# Altium PCB printer_tag_device.PcbDoc (part 2 of 3)
Units mm, origin at the board's own origin, x right, y up, seen from the top; angles counter-clockwise.
Board outline 140.18 x 100.02 mm, 2 copper layers (Top Layer, Bottom Layer); 258 components, 169 nets, 954 pads, 344 vias.
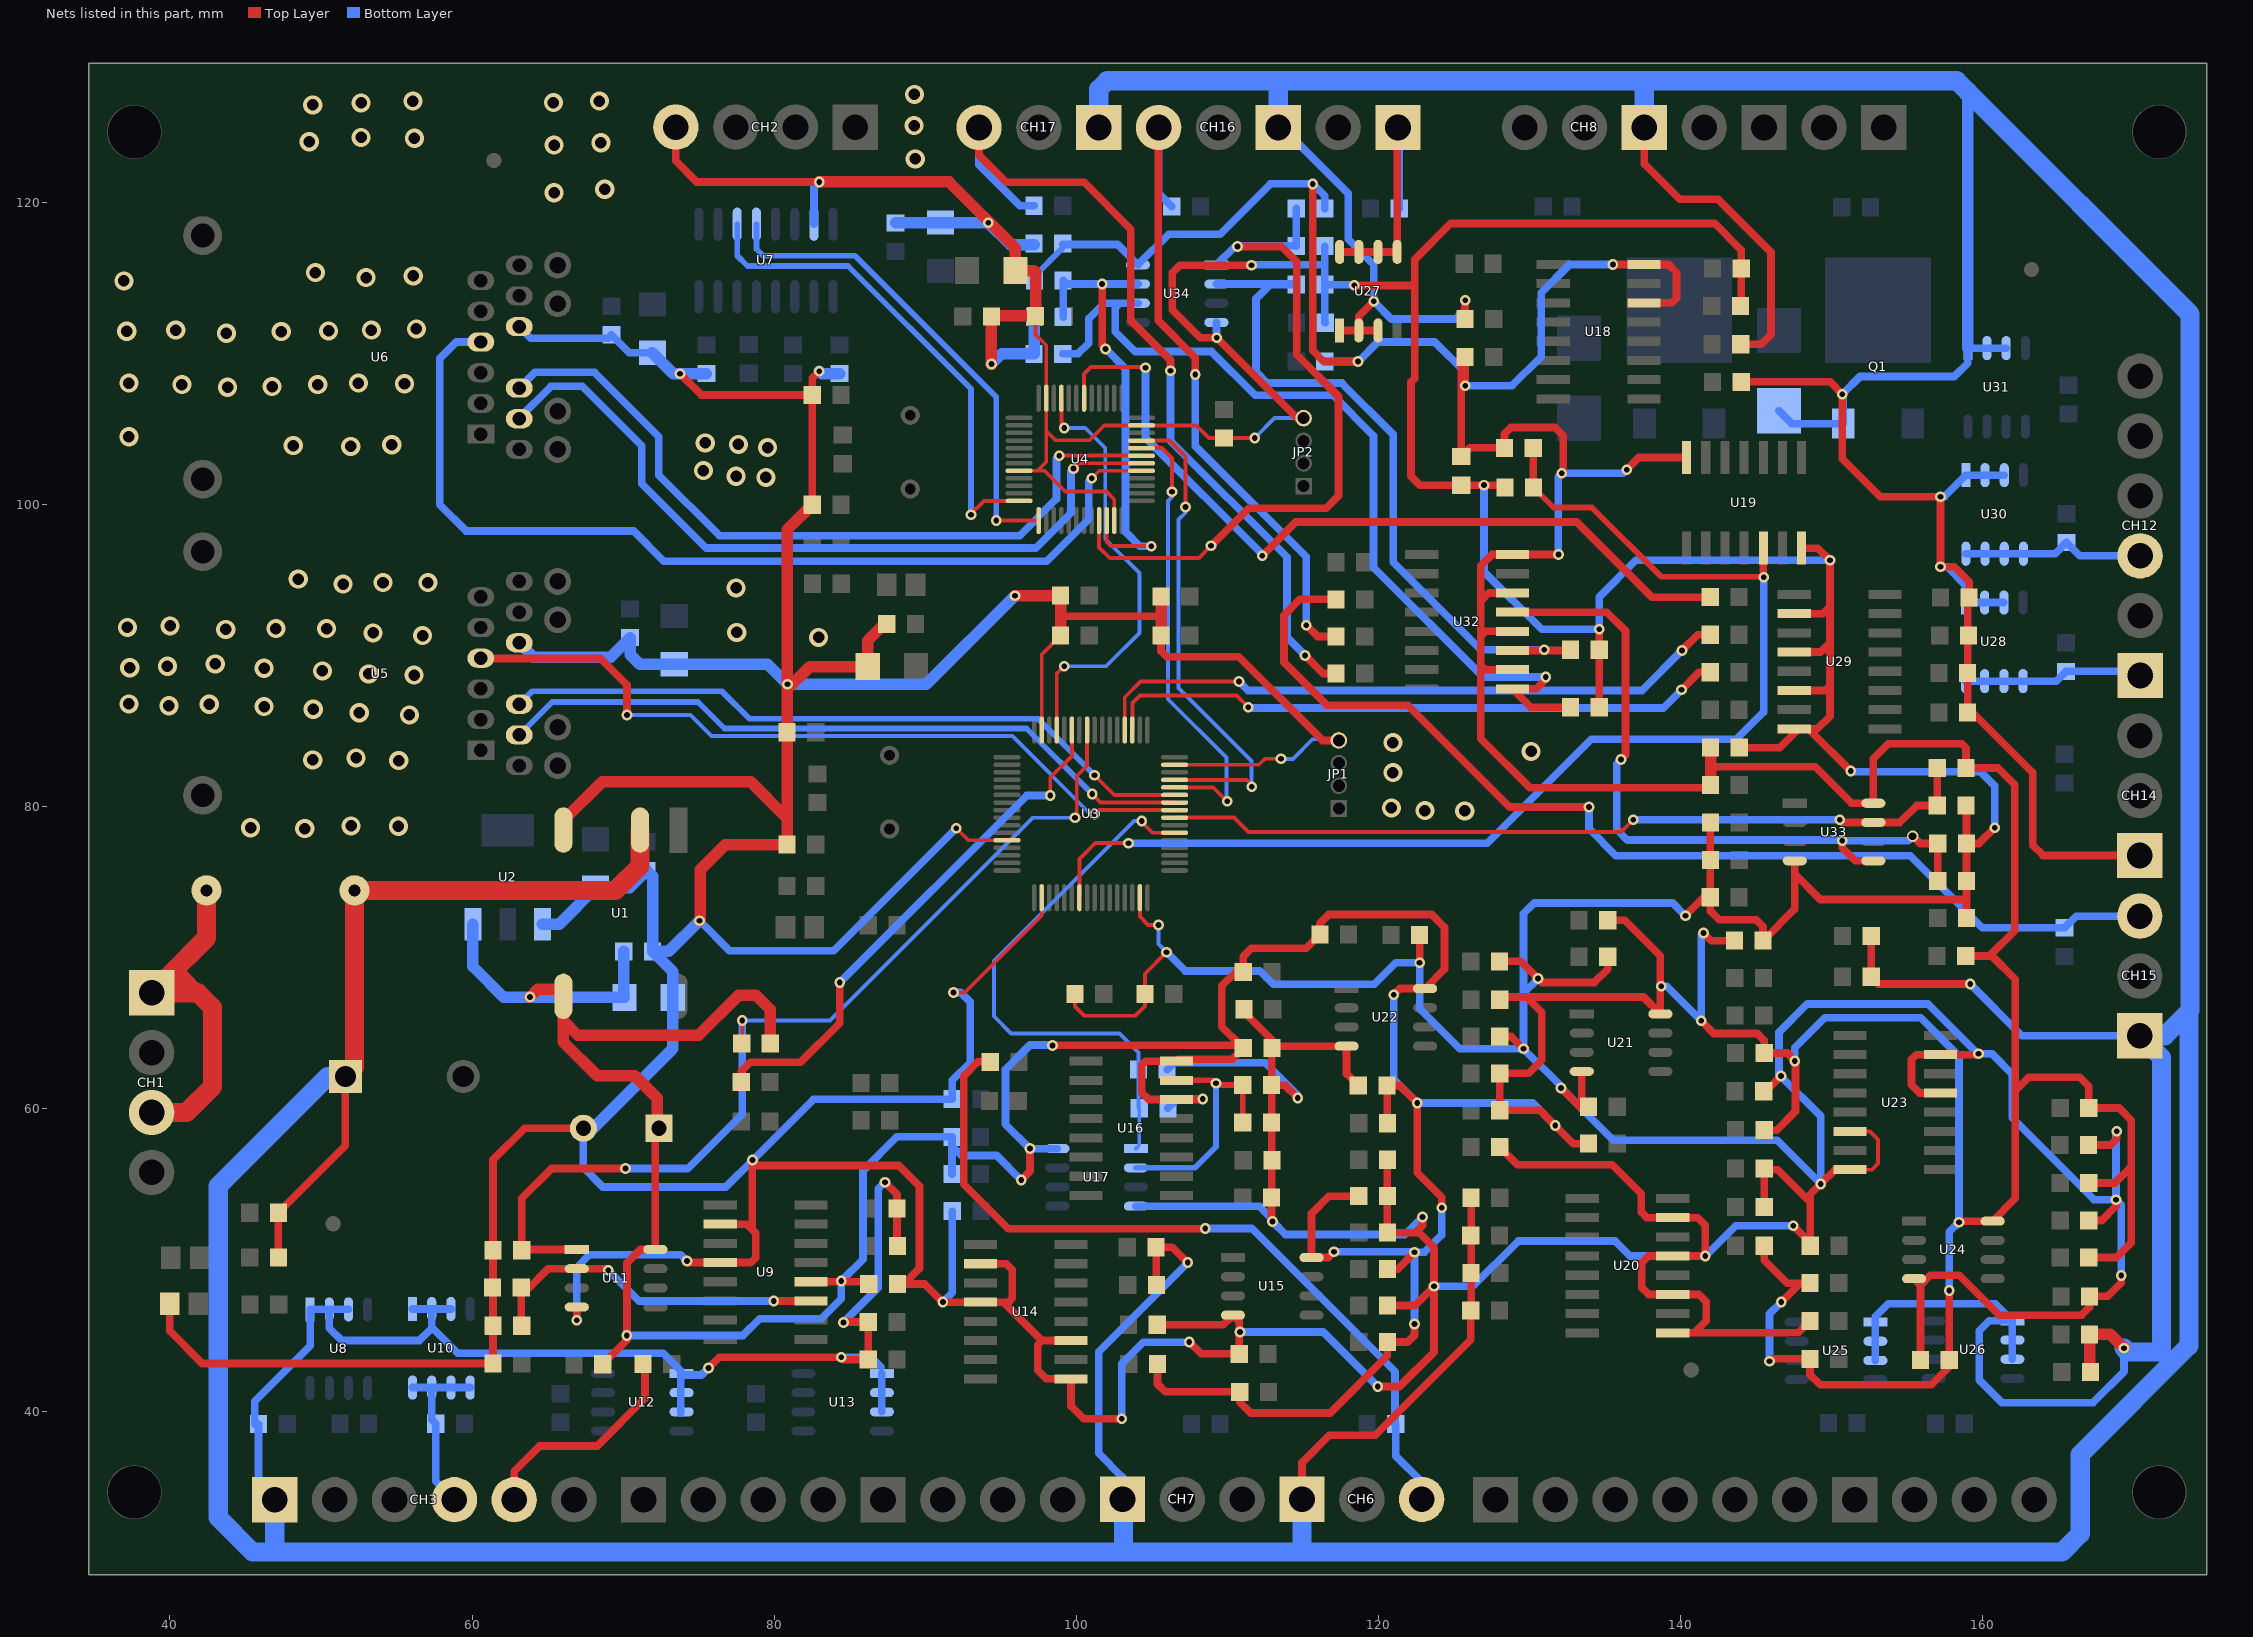
[diagram p2: the nets of this part, all layers, seen from the top]

## Via types
v1: diameter 0.711, hole 0.381, Top Layer to Bottom Layer, 231 vias
v2: diameter 1.27, hole 0.762, Top Layer to Bottom Layer, 107 vias
v3: diameter 3.4, hole 3.4, Top Layer to Bottom Layer, 4 vias
v4: diameter 0.711, hole 0.305, Top Layer to Bottom Layer, 1 vias
v5: diameter 0.762, hole 0.508, Top Layer to Bottom Layer, 1 vias

## Nets (pads, with @x,y where several pads share a name; then routed paths per layer and width w, separated by ;. In a path a pad name is that pad's centre, name@x,y a point inside that pad or via, vN(x,y) a via of type N, cw(c..) or ccw(c..) an arc to the next point about the centre after c; other vN are vias at no path point) (continued)
+5V: C2.2 C3.1 C5.1 C35.2 C40.2 C45.2 C51.2 C57.2 C58.2 C65.2 C76.2 C83.2 R18.1 R20.1 R27.1 R28.1 R30.1 R31.1 R33.1 R35.1 R37.1 R38.1 R46.1 R48.1 R52.1 R54.1 R55.1 R56.1 R59.1 R60.1 R61.1 R62.1 R64.1 R66.1 R68.1 R69.1 R71.1 R72.1 R74.1 R88.2 R90.2 R91.2 R96.2 R98.2 R99.2 U1.5 U2.3 U9.12 U11.8 U15.8 U16.14 U16.16 U17.8 U18.14 U18.16 U19.14 U21.8 U22.8 U24.8 U32.10 U32.12 U32.14 U32.16 U33.8 U34.8 | length 616.5
  Top Layer w0.508: R20.1@68.641,43.104 70.256,44.719 70.256,49.809 71.145,50.698 U11.8@72.129,50.698 72.129,59.531 72.263,59.665 ; U9.12@82.426,48.565 86.096,48.565 C35.2@86.248,48.412 ; v1(96.342,55.296) 96.926,55.88 v1(96.926,57.379) ; v1(98.425,64.211) C40.2@110.861,64.211 ; R33.1@105.369,43.129 105.369,41.798 105.893,41.275 R27.1@110.81,41.275 110.81,40.599 111.531,39.878 116.789,39.878 120.584,43.673 R30.1@120.584,44.577 121.92,44.577 122.377,45.034 v1(122.377,45.771) ; v1(108.356,60.655) 108.331,60.63 U16.14@106.632,60.63 104.775,60.63 104.318,61.087 104.318,62.916 104.572,63.17 U16.16@106.632,63.17 106.764,63.302 110.307,63.302 C40.2@111.039,64.033 C40.2@110.861,64.211 ; v1(115.646,121.234) 115.646,110.211 116.383,109.474 v1(118.643,109.474) ; v1(117.043,50.546) 116.662,50.165 U15.8@115.563,50.165 115.563,53.079 116.713,54.229 C45.2@118.684,54.229 ; R31.1@120.584,49.403 121.26,49.403 v1(122.377,50.521) ; R28.1@120.584,59.055 120.584,61.519 C58.2@120.559,61.544 121.412,61.544 v1(122.555,60.401) 122.555,55.778 124.181,54.153 v1(124.181,53.467) ; v1(121.006,67.564) 121.412,67.97 U22.8@123.081,67.97 124.358,69.247 124.358,72.034 123.52,72.873 116.713,72.873 116.119,72.278 R56.1@116.119,71.552 115.204,70.637 111.582,70.637 111.039,70.094 R54.1@111.039,69.063 110.541,69.063 109.626,68.148 109.626,65.446 C40.2@110.861,64.211 ; R48.1@125.72,109.779 R48.1@125.72,109.601 ; v1(125.73,107.874) 125.72,107.884 R48.1@125.72,109.601 ; R62.1@128.204,67.412 137.534,67.412 U21.8@138.652,66.294 138.652,70.136 136.296,72.492 R55.1@135.164,72.492 ; U32.10@128.857,89.078 127.076,89.078 126.771,89.383 ; U32.12@128.857,91.618 127.102,91.618 126.771,91.288 ; U32.14@128.857,94.158 127.305,94.158 126.771,93.624 ; 129.972,67.234 130.81,66.396 130.81,63.221 129.946,62.357 R61.1@128.026,62.357 R66.1@128.026,59.919 130.683,59.919 132.893,57.709 R52.1@133.899,57.709 ; v1(131.902,96.698) U32.16@128.857,96.698 127.508,96.698 126.771,95.961 126.771,93.624 ; v1(132.131,102.083) 132.232,102.184 132.232,104.572 131.699,105.105 128.753,105.105 128.336,104.689 R46.1@128.336,103.759 126.05,103.759 C51.2@125.476,103.185 125.476,109.357 R48.1@125.72,109.601 ; v1(135.509,115.9) U18.16@137.569,115.9 139.192,115.9 139.725,115.367 139.725,113.665 139.421,113.36 U18.14@137.569,113.36 ; v1(136.423,102.311) 137.239,103.127 U19.14@140.386,103.127 ; v1(141.351,65.837) 142.189,64.999 145.059,64.999 145.527,64.531 R60.1@145.527,63.703 147.066,63.703 147.599,63.17 147.599,59.842 146.36,58.603 R59.1@145.527,58.603 ; v1(141.503,71.653) 142.011,71.145 C57.2@143.551,71.145 ; R88.2@141.976,81.439 141.792,81.255 130.023,81.255 126.771,84.506 126.771,89.383 ; 141.976,82.677 142.001,82.652 148.895,82.652 151.308,80.239 U33.8@152.749,80.239 152.749,83.178 153.746,84.176 158.598,84.176 158.887,83.886 R90.2@158.887,82.575 160.985,82.575 162.103,81.458 162.103,71.806 160.426,70.129 ; R64.1@145.527,50.952 145.527,50.002 147.058,48.472 147.913,48.472 ; v1(145.872,43.307) 146.025,43.459 R68.1@148.554,43.459 148.554,42.428 149.225,41.758 156.591,41.758 157.77,42.936 C65.2@157.77,43.383 v1(157.77,47.981) ; v1(146.66,47.219) 147.913,48.472 ; R69.1@148.554,48.472 147.913,48.472 ; v1(158.42,52.502) 158.496,52.578 U24.8@160.648,52.578 162.154,54.084 162.154,61.214 ; R91.2@158.862,70.129 160.426,70.129 ; R74.1@167.015,50.165 168.834,50.165 169.824,51.156 169.824,59.258 169.012,60.071 R72.1@167.015,60.071 167.015,61.509 166.421,62.103 163.043,62.103 162.154,61.214 ; R71.1@167.015,55.103 168.742,55.103 169.697,56.058 ; 126.771,89.383 126.771,91.288 ; 126.771,91.288 126.771,93.624 ; 160.426,70.129 160.604,70.129 162.154,68.58 162.154,61.214
  Top Layer w0.762: v1(63.83,67.412) 64.336,67.918 65.583,67.918 U1.5@66.04,67.461 66.04,65.837 ; 72.263,59.665 72.263,60.706 70.764,62.205 68.275,62.205 66.04,64.44 66.04,65.837 ; R18.1@79.741,64.338 79.741,66.589 78.791,67.539 77.648,67.539 75.006,64.897 66.98,64.897 66.04,65.837 ; R88.2@141.976,81.439 141.976,82.677 C76.2@141.976,83.922
  Bottom Layer w0.381: R98.2@97.221,114.833 97.221,115.128 99.096,117.003 99.096,117.221 C83.2@99.096,117.297
  Bottom Layer w0.508: v1(70.231,45.009) 77.927,45.009 79.045,46.126 83.109,46.126 84.43,47.447 v1(84.43,48.616) 85.877,50.063 85.877,55.931 88.104,58.158 R37.1@91.76,58.158 R37.1@91.76,57.567 ; R38.1@91.76,55.685 R37.1@91.76,57.567 ; v1(96.342,55.296) 94.717,56.921 92.405,56.921 R37.1@91.76,57.567 ; v1@98.45,64.237 96.926,64.237 95.301,62.611 95.301,59.004 v1(96.926,57.379) U17.8@98.737,57.379 ; C83.2@99.096,117.221 102.725,117.221 U34.8@104.071,115.875 106.103,117.907 109.525,117.907 112.852,121.234 v1(115.646,121.234) 116.444,120.437 R96.2@116.444,119.609 ; R35.1@106.055,60.046 106.665,60.655 v1(108.356,60.655) ; R99.2@116.444,109.474 v1(118.643,109.474) 119.939,110.769 123.723,110.769 125.73,108.763 v1(125.73,107.874) 128.829,107.874 130.759,109.804 130.759,114.021 132.639,115.9 v1(135.509,115.9) ; v1(117.043,50.546) 122.377,50.546 v1(122.377,50.521) ; v1(121.006,67.564) 121.006,61.951 v1(122.555,60.401) 130.2,60.401 v1(131.699,58.903) ; v1(122.377,45.771) v1(122.377,50.521) ; v1(124.181,53.467) 124.181,51.664 123.038,50.521 v1(122.377,50.521) ; v1(131.902,96.698) 131.902,101.854 v1(132.131,102.083) 136.195,102.083 v1(136.423,102.311) ; v1(138.709,68.123) 139.065,68.123 v1(141.351,65.837) 141.351,71.501 v1(141.503,71.653) ; v1(145.872,43.307) 145.872,46.431 v1(146.66,47.219) ; v1(147.549,63.17) 147.549,64.059 149.53,66.04 155.88,66.04 158.42,63.5 v1(158.42,52.502) 157.785,51.867 157.785,47.996 v1(157.77,47.981)
  Bottom Layer w0.762: U2.3@60.057,72.236 60.057,69.432 62.103,67.386 C5.1@70.079,67.386 70.043,67.422 C2.2@70.043,70.434
+24V: C1.1 C4.2 C30.1 CH3.1 CH6.1 CH7.1 CH8.1 CH14.1 CH15.1 CH16.1 CH17.1 D3.2 F1.2 Q1.3 R1.2 R13.2 R15.1 R22.2 R23.2 R26.1 R32.1 R44.1 R49.1 R50.1 R51.1 R53.1 R63.1 R65.1 R67.1 R73.1 R75.1 R76.1 R79.1 R80.1 R83.1 R84.1 U1.2 U8.1 U8.2 U8.3 U10.1 U10.2 U10.3 U12.1 U12.2 U12.3 U13.1 U13.2 U13.3 U25.1 U25.2 U25.3 U26.1 U26.2 U26.3 U27.1 U27.2 U27.3 U28.1 U28.2 U28.3 U30.1 U30.2 U30.3 U31.1 U31.2 U31.3 | length 763.5
  Top Layer w0.508: R1.2@47.178,50.165 C4.2@47.178,53.137 51.613,57.572 C1.1@51.613,62.154 ; v1(75.641,42.85) 76.352,43.561 v1(84.43,43.561) 84.582,43.409 R32.1@86.223,43.409 R26.1@86.223,45.898 84.607,45.898 v1(84.582,45.872) ; v1(87.325,55.143) 88.123,54.346 R13.2@88.123,53.416 88.123,50.952 R15.1@88.148,50.927 ; R23.2@105.293,48.362 105.293,50.825 R22.2@105.268,50.851 106.35,50.851 v1(107.366,49.835) ; CH6.1@114.935,34.163 114.935,36.601 116.738,38.405 119.786,38.405 126.101,44.719 R65.1@126.101,46.66 126.126,46.685 R63.1@126.126,49.149 R51.1@126.126,54.127 ; U27.1@117.424,111.531 U27.2@118.694,111.531 ; v1(119.685,113.462) 118.694,112.471 U27.2@118.694,111.531 ; U27.3@119.964,111.531 U27.2@118.694,111.531 ; R44.1@125.72,112.293 125.72,113.528 v1(125.73,113.538) ; CH8.1@137.592,124.968 137.592,122.555 139.929,120.218 142.469,120.218 145.974,116.713 145.974,111.252 145.339,110.617 R49.1@143.977,110.617 ; R50.1@144.003,108.128 149.885,108.128 v1(150.698,107.315) 150.698,103.048 153.213,100.533 v1(157.201,100.533) v1(157.201,95.885) 158.115,95.885 159.09,94.91 R79.1@159.09,93.853 158.989,93.751 R83.1@158.989,88.849 R84.1@158.989,86.233 159.334,86.233 163.297,82.271 163.297,77.47 163.982,76.784 CH14.1@170.383,76.784 ; R73.1@152.613,71.45 R67.1@152.613,68.758 153.096,68.275 v1(159.156,68.275)
  Top Layer w0.762: R75.1@167.117,42.596 167.066,42.647 R76.1@167.066,45.085 168.427,45.085 v1(169.342,44.171)
  Top Layer w1.27: C1.1@51.613,62.154 52.222,62.763 F1.2@52.222,74.473 69.494,74.473 71.12,76.098 U1.2@71.12,78.461
  Bottom Layer w0.508: C30.1@45.608,39.141 45.608,40.655 49.276,44.323 U8.1@49.276,46.736 U8.2@50.546,46.736 ; C30.1@45.862,39.141 45.862,35.215 CH3.1@46.939,34.138 ; U8.3@51.816,46.736 U8.2@50.546,46.736 ; U10.1@56.058,46.761 U10.2@57.328,46.761 ; U10.3@58.598,46.761 U10.2@57.328,46.761 ; U12.3@73.812,39.853 U12.1@73.812,42.393 ; v1(75.641,42.85) 75.184,42.393 U12.1@73.812,42.393 ; v1(84.43,43.561) 86.411,43.561 87.071,42.901 ; v1(84.582,45.872) 86.893,48.184 86.893,54.712 v1(87.325,55.143) ; U13.3@87.122,39.954 U13.2@87.122,41.224 U13.1@87.122,42.494 ; CH7.1@103.048,34.163 103.048,35.636 101.473,37.211 101.473,43.942 v1(107.366,49.835) ; CH16.1@113.36,124.968 113.614,124.968 117.983,120.599 117.983,117.577 119.685,115.875 v1(119.685,113.462) 120.853,112.293 125.12,112.293 125.73,112.903 v1(125.73,113.538) ; D3.2@146.507,106.229 147.368,105.368 Q1.3@150.76,105.368 150.76,107.253 v1(150.698,107.315) 151.867,108.483 158.115,108.483 159.004,109.372 U31.1@159.004,110.363 U31.2@160.274,110.363 U31.3@161.544,110.363 ; U25.3@152.883,43.358 U25.2@152.883,44.628 U25.1@152.883,45.898 152.883,46.253 153.746,47.117 160.807,47.117 U26.1@161.95,45.974 ; v1(157.201,95.885) 157.632,95.885 158.852,94.666 U28.1@158.852,93.523 U28.2@160.122,93.523 U28.3@161.392,93.523 ; v1(157.201,100.533) 157.455,100.533 U30.1@158.877,101.956 U30.2@160.147,101.956 U30.3@161.417,101.956 ; v1(159.156,68.275) 162.585,64.846 CH15.1@170.383,64.846 ; U26.3@161.95,43.434 U26.2@161.95,44.704 U26.1@161.95,45.974 ; v1(169.342,44.171) 169.342,42.621 167.284,40.564 161.265,40.564 159.766,42.062 159.766,45.314 160.426,45.974 U26.1@161.95,45.974 ; U8.2@50.546,46.736 50.546,45.491 51.359,44.679 56.515,44.679 57.328,45.491 57.328,45.568 ; 57.328,45.568 59.055,43.84 72.644,43.84 73.812,42.672 U12.1@73.812,42.393 ; 57.328,45.568 U10.2@57.328,46.761
  Bottom Layer w0.762: U31.1@159.004,110.363 159.004,127.33
  Bottom Layer w1.27: CH3.1@46.939,34.138 46.939,30.668 ; C1.1@51.613,62.154 50.444,62.154 43.193,54.902 43.193,32.956 45.481,30.668 46.939,30.668 ; CH17.1@101.473,124.968 101.473,127.508 102.032,128.067 113.792,128.067 ; CH7.1@103.048,34.163 103.124,34.087 103.124,30.668 ; CH16.1@113.36,124.968 113.36,127.635 113.792,128.067 ; CH6.1@114.935,34.163 114.935,30.668 ; CH8.1@137.592,124.968 137.592,127.914 137.744,128.067 ; v1(169.342,44.171) 169.596,43.917 171.831,43.917 171.831,63.398 CH15.1@170.383,64.846 172.034,64.846 173.634,66.446 ; 46.939,30.668 103.124,30.668 ; 103.124,30.668 114.935,30.668 ; 113.792,128.067 137.744,128.067 ; 114.935,30.668 165.237,30.668 166.446,31.877 166.446,37.135 173.634,44.323 173.634,66.446 ; 137.744,128.067 158.267,128.067 159.004,127.33 173.711,112.624 173.711,66.523 173.634,66.446
+24V_IN: CH1.1 CH1.3 F1.1 | length 23.6
  Top Layer w1.016: CH1.1@39.853,68.758 40.767,68.758 41.834,67.691
  Top Layer w1.27: CH1.3@38.786,59.771 41.102,59.771 42.824,61.493 42.824,66.7 41.834,67.691 CH1.1@38.786,67.691 ; CH1.1@39.853,68.758 42.418,71.323 F1.1@42.418,74.473
AIR_BLOW_IN: R85.1 U3.51 | length 41.6
  Top Layer w0.254: U3.51@103.702,85.087 103.702,86.862 104.216,87.376 110.592,87.376 v1(111.379,86.589)
  Top Layer w0.508: v1(140.056,87.757) 141.211,88.913 R85.1@141.95,88.913
  Bottom Layer w0.508: v1(111.379,86.589) 111.43,86.538 138.836,86.538 v1(140.056,87.757)
AIR_BLOW_OUT: C72.2 CH12.3 U30.5 U30.6 U30.7 U30.8 | length 12.2
  Bottom Layer w0.508: U30.8@158.877,96.756 U30.7@160.147,96.756 U30.6@161.417,96.756 U30.5@162.687,96.756 164.787,96.756 C72.2@165.532,97.5 166.415,96.617 CH12.3@170.409,96.617
AIR_CYLINDER_IN: R82.1 U3.52 | length 43.1
  Top Layer w0.254: U3.52@103.202,85.087 103.202,87.251 104.242,88.29 v1(110.769,88.29)
  Top Layer w0.508: v1(140.081,90.348) 141.129,91.396 R82.1@141.95,91.396
  Bottom Layer w0.508: v1(110.769,88.29) 111.354,87.706 137.439,87.706 v1(140.081,90.348)
AIR_CYLINDER_OUT: C71.2 CH12.1 U28.5 U28.6 U28.7 U28.8 | length 11.9
  Bottom Layer w0.508: U28.8@158.852,88.323 U28.7@160.122,88.323 U28.6@161.392,88.323 U28.5@162.662,88.323 164.863,88.323 C71.2@165.506,88.966 170.139,88.966 CH12.1@170.409,88.697
BAFFLE_IN: R81.1 U4.42 | length 54.2
  Top Layer w0.254: U4.42@100.504,107.047 100.504,108.657 100.965,109.118 104.521,109.118 v1(104.572,109.068)
  Top Layer w0.508: v1(112.293,96.622) 114.529,98.857 133.121,98.857 138.1,93.878 R81.1@141.95,93.878
  Bottom Layer w0.508: v1(104.572,109.068) 104.572,104.445 112.293,96.723 v1(112.293,96.622)
BAFFLE_INTER: C86.2 R102.2 U32.9 U34.6 | length 59.4
  Top Layer w0.508: v1(131.064,88.595) 131.064,88.443 130.429,87.808 U32.9@128.857,87.808 130.076,86.589 R102.2@132.705,86.589
  Bottom Layer w0.508: C86.2@99.096,109.982 100.101,109.982 100.813,110.693 100.813,112.319 101.829,113.335 102.87,113.335 ; U34.6@104.071,113.335 102.87,113.335 ; v1(131.064,88.595) 126.924,88.595 119.659,95.86 119.659,104.572 116.992,107.239 111.836,107.239 108.941,110.134 103.886,110.134 102.565,111.455 102.565,113.03 102.87,113.335
BAFFLE_INTER_IN: C87.2 CH17.3 R100.1 | length 56.8
  Top Layer w0.508: CH17.3@93.553,124.968 93.553,123.134 95.352,121.336 100.508,121.336 103.607,118.237 103.607,112.192 106.223,109.576 v1(106.223,108.864) ; v1(115.138,90.018) 116.332,88.824 R100.1@117.185,88.824
  Bottom Layer w0.508: CH17.3@93.553,124.968 93.553,122.499 96.266,119.786 C87.2@97.196,119.786 ; v1@106.172,108.89 v1@106.223,108.839 ; v1(106.223,108.864) v1@106.223,108.839 ; v1(115.138,90.018) 113.944,91.211 113.944,96.52 106.223,104.242 v1@106.223,108.839
BAFFLE_INTER_OUT: C82.1 R98.1 U4.22 U34.7 | length 31.1
  Top Layer w0.254: U4.22@102.004,98.947 102.004,97.539 102.286,97.257 v1(104.953,97.257)
  Top Layer w0.508: v1(101.702,114.605) 101.702,110.541 v1(101.93,110.312)
  Bottom Layer w0.508: C82.1@99.121,112.42 R98.1@99.121,114.833 ; R98.1@99.121,114.859 99.375,114.605 v1(101.702,114.605) U34.7@104.071,114.605 ; v1(101.93,110.312) 103.251,108.991 103.251,98.196 104.191,97.257 v1(104.953,97.257)
BAFFLE_OUT: C70.2 CH13.1 U27.5 U27.6 U27.7 U27.8 | length 17.5
  Top Layer w0.508: U27.8@117.424,116.731 U27.7@118.694,116.731 U27.6@119.964,116.731 U27.5@121.234,116.731 121.234,124.917 CH13.1@121.285,124.968
  Bottom Layer w0.508: CH13.1@121.285,124.968 121.371,124.882 C70.2@121.371,119.609
BAFFLE_OUTER: C84.1 R97.2 U32.11 U34.2 | length 48.7
  Top Layer w0.508: U32.11@128.857,90.348 132.654,90.348 R97.2@132.705,90.399
  Bottom Layer w0.508: U34.2@109.271,114.605 114.506,114.605 C84.1@114.544,114.567 112.814,114.567 111.887,113.64 111.887,108.788 112.624,108.052 117.577,108.052 120.98,104.648 120.98,96.19 126.771,90.399 v1(130.962,90.399)
BAFFLE_OUTER_IN: C85.2 CH16.3 R95.1 | length 44.9
  Top Layer w0.508: CH16.3@105.44,124.968 105.41,124.938 105.41,112.192 107.874,109.728 v1(107.874,108.61) ; v1(115.214,92.024) 115.959,91.279 R95.1@117.185,91.279
  Bottom Layer w0.508: CH16.3@105.44,124.968 105.44,120.61 C85.2@106.314,119.736 ; v1@107.874,108.636 v1(107.874,108.61) 107.874,103.886 115.214,96.545 v1(115.214,92.024)
BAFFLE_OUTER_OUT: C81.1 R96.1 U4.21 U34.1 | length 48.9
  Top Layer w0.254: U4.21@101.504,98.947 101.504,97.175 102.21,96.469 108.102,96.469 v1(108.915,97.282)
  Top Layer w0.508: v1(108.915,97.282) 111.404,99.771 116.535,99.771 117.348,100.584 117.348,107.163 114.579,109.931 114.579,116.078 113.563,117.094 v1(110.668,117.094)
  Bottom Layer w0.508: U34.1@109.271,115.875 110.541,117.145 114.512,117.145 C81.1@114.544,117.113 R96.1@114.544,119.609
CPU1_FOR_CPU2_1: U3.44 U4.32 | length 30.6
  Top Layer w0.254: U4.32@104.304,103.747 105.676,103.747 106.324,103.099 v1(106.324,100.863) ; U3.44@106.502,81.287 109.061,81.287 v1(109.982,80.366)
  Bottom Layer w0.254: v1(106.324,100.863) 106.324,100.508 106.07,100.254 106.07,87.122 109.931,83.261 109.931,80.416 v1(109.982,80.366)
CPU1_FOR_CPU2_2: U3.45 U4.33 | length 32.7
  Top Layer w0.254: U4.33@104.304,104.247 106.167,104.247 107.213,103.2 v1(107.213,99.847) ; U3.45@106.502,81.787 111.279,81.787 v1@111.608,81.458
  Bottom Layer w0.254: v1(107.213,99.847) 107.213,99.466 106.756,99.009 106.756,87.859 111.582,83.033 111.582,81.356 v1(111.608,81.331)
CPU1_FOR_CPU2_3: U3.61 U4.45 | length 28.8
  Top Layer w0.254: U3.61@98.702,85.087 98.702,88.822 v1(99.187,89.306) ; U4.45@99.004,107.047 99.004,105.263 v1(99.187,105.08)
  Bottom Layer w0.254: v1(99.187,89.306) 101.956,89.306 104.165,91.516 104.165,95.479 101.905,97.739 101.905,103.759 100.584,105.08 v1(99.187,105.08)
CPU1_NET_RST: U3.41 U5.4 | length 51.5
  Top Layer w0.254: v1(101.194,79.527) 101.453,79.787 U3.41@106.502,79.787
  Top Layer w0.508: U5.4@60.579,89.84 60.604,89.814 68.504,89.814 70.256,88.062 v1(70.256,86.081)
  Bottom Layer w0.254: v1(70.256,86.081) 74.447,86.081 75.844,84.684 95.758,84.684 100.914,79.527 v1(101.194,79.527)
CPU1_USART1_RXD: U3.43 U5.9 | length 46.6
  Top Layer w0.254: v1(101.194,82.093) 102.5,80.787 U3.43@106.502,80.787
  Bottom Layer w0.381: U5.9@63.119,86.792 63.983,87.655 76.53,87.655 78.359,85.827 97.46,85.827 v1(101.194,82.093)
CPU1_USART1_TXD: U3.42 U5.8 | length 47
  Top Layer w0.254: v1(101.041,80.848) 101.603,80.287 U3.42@106.502,80.287
  Bottom Layer w0.381: U5.8@63.119,84.76 65.303,86.944 74.955,86.944 76.708,85.192 96.698,85.192 v1(101.041,80.848)
CPU2_NET_RST: U4.29 U6.4 | length 65.1
  Top Layer w0.254: v1@100.901,101.867 100.813,101.778 100.838,101.752 v1(101.016,101.752) 101.51,102.247 U4.29@104.304,102.247
  Bottom Layer w0.508: U6.4@60.579,110.769 58.953,110.769 57.861,109.677 57.861,100 59.601,98.26 70.701,98.26 72.695,96.266 98.044,96.266 100.813,99.035 100.813,101.549 v1(101.016,101.752)
CPU2_USART1_RXD: U4.31 U6.9 | length 51.4
  Top Layer w0.254: v1(98.857,103.247) U4.31@104.304,103.247
  Bottom Layer w0.508: U6.9@63.119,107.721 64.16,108.763 68.097,108.763 72.365,104.496 72.365,101.956 76.378,97.942 96.241,97.942 98.679,100.381 98.679,103.069 v1(98.857,103.247)
CPU2_USART1_TXD: U4.30 U6.8 | length 52
  Top Layer w0.254: v1(99.809,102.387) 100.169,102.747 U4.30@104.304,102.747
  Bottom Layer w0.508: U6.8@63.119,105.689 63.119,105.74 65.227,107.848 67.285,107.848 71.222,103.911 71.222,101.397 75.489,97.13 97.307,97.13 99.644,99.466 99.644,102.222 v1(99.809,102.387)
CPU2_USART2_RXD: U4.13 U7.12 | length 32.7
  Top Layer w0.254: v1@94.564,98.933 94.578,98.947 U4.13@97.504,98.947
  Bottom Layer w0.381: U7.12@78.816,118.567 78.816,116.916 79.248,116.484 85.344,116.484 94.691,107.137 v1(94.691,98.958)
CPU2_USART2_TXD: U4.12 U7.11 | length 33.1
  Top Layer w0.254: v1@92.964,99.339 93.872,100.247 U4.12@96.204,100.247
  Bottom Layer w0.381: U7.11@77.546,118.567 77.546,116.484 78.232,115.799 84.887,115.799 93.015,107.671 v1(93.015,99.339)
CPU_CONTROL_ROLL: R46.2 R47.1 U3.23 U19.5 | length 83
  Top Layer w0.254: U3.23@100.202,73.987 100.202,76.555 101.244,77.597 v1(103.454,77.597)
  Top Layer w0.381: R47.1@130.261,101.143 131.582,99.822 134.112,99.822 138.709,95.225 145.466,95.225 v1(145.491,95.199)
  Top Layer w0.508: R46.2@130.236,103.759 130.236,101.168 R47.1@130.261,101.143 ; v1@145.466,95.225 U19.5@145.466,97.127
  Bottom Layer w0.508: v1(103.454,77.597) 127.203,77.597 134.087,84.48 143.688,84.48 145.491,86.284 v1(145.491,95.199)
DIR11_IN: R16.1 U3.59 | length 35.2
  Top Layer w0.254: v1(98.273,80.747) 98.273,81.94 99.702,83.37 U3.59@99.702,85.087
  Top Layer w0.508: R16.1@77.815,61.798 77.815,62.499 78.41,63.094 81.737,63.094 84.328,65.684 v1(84.328,68.377)
  Bottom Layer w0.508: v1(84.328,68.377) 84.353,68.377 96.723,80.747 v1(98.273,80.747)
DIR11_OUT: C32.2 CH3.4 U10.5 U10.6 U10.7 U10.8 | length 11.9
  Bottom Layer w0.508: U10.8@56.058,41.561 U10.7@57.328,41.561 ; CH3.4@58.826,34.138 57.597,35.367 C32.2@57.597,39.167 57.328,39.436 U10.7@57.328,41.561 ; U10.5@59.868,41.561 U10.6@58.598,41.561 U10.7@57.328,41.561
ER11: C34.1 R19.2 U9.11 U11.2 | length 23.1
  Top Layer w0.508: C34.1@63.282,45.652 63.256,45.678 R19.2@63.256,48.175 63.771,48.175 65.024,49.428 U11.2@66.929,49.428 68.91,49.428 v1(69.012,49.327) ; v1(79.959,47.295) U9.11@82.426,47.295
  Bottom Layer w0.508: v1(69.012,49.327) 71.044,47.295 v1(79.959,47.295)
ERR11_IN: CH3.5 R17.1 | length 14.8
  Top Layer w0.508: CH3.5@62.786,34.138 62.786,36.015 64.465,37.694 68.275,37.694 71.44,40.858 R17.1@71.44,43.129
ERR11_OUT: C33.1 R18.2 U3.57 U11.1 | length 65.5
  Top Layer w0.254: R18.2@77.841,64.262 77.876,64.298 v1(77.876,65.862) ; v1(99.898,79.273) 100.025,79.4 100.025,82.042 100.702,82.719 U3.57@100.702,85.087
  Top Layer w0.508: U11.1@66.929,50.698 63.332,50.698 C33.1@63.282,50.648 63.282,54.087 65.253,56.058 v1(70.155,56.058)
  Bottom Layer w0.254: v1(77.876,65.862) 83.693,65.862 97.104,79.273 v1(99.898,79.273)
  Bottom Layer w0.508: v1(70.155,56.058) 74.27,56.058 77.876,59.665 v1(77.876,65.862)
FIT_REACH: C79.2 R94.2 U32.13 U33.5 | length 48.6
  Top Layer w0.508: U32.13@128.857,92.888 135.103,92.888 136.347,91.643 136.347,83.439 v1(136.042,83.134) ; v1(150.698,77.749) 150.698,77.292 151.562,76.429 U33.5@152.749,76.429 ; v5(155.346,78.054) 155.372,78.054 155.854,77.572 C79.2@157.013,77.572 R94.2@157.013,75.082
  Bottom Layer w0.508: v1(136.042,83.134) 135.763,82.855 135.763,78.511 136.474,77.8 150.647,77.8 v1(150.698,77.749) 155.042,77.749 v5(155.346,78.054)
FIT_REACH_IN: C80.2 CH15.3 R92.1 | length 72.1
  Top Layer w0.508: R92.1@117.185,93.734 114.791,93.734 113.741,92.685 113.741,89.56 116.586,86.716 121.945,86.716 128.676,79.985 v1(133.934,79.985)
  Bottom Layer w0.508: v1(133.934,79.985) 133.934,78.537 135.712,76.759 155.194,76.759 159.959,71.994 C80.2@165.405,71.994 166.177,72.766 CH15.3@170.383,72.766
FIT_REACH_OUT: C75.1 R90.1 U3.40 U33.7 | length 54.3
  Top Layer w0.254: U3.40@106.502,79.287 110.426,79.287 111.379,78.334 136.042,78.334 v1(136.855,79.146)
  Top Layer w0.508: v1(150.52,79.146) 150.698,78.969 U33.7@152.749,78.969 154.508,78.969 155.626,80.086 C75.1@156.987,80.086 R90.1@156.987,82.575
  Bottom Layer w0.508: v1(136.855,79.146) v1(150.52,79.146) v1@150.546,79.121
FLUID_BAG: C46.1 R36.1 U16.15 U17.2 | length 17.1
  Top Layer w0.381: U16.15@106.632,61.9 109.042,61.9 v1(109.245,61.697) 109.36,61.582 C46.1@111.013,61.582 R36.1@111.013,59.106
  Bottom Layer w0.381: U17.2@103.937,56.109 107.848,56.109 109.245,57.506 v1(109.245,61.697)
FLUID_BAG_IN: C47.2 CH6.3 R34.1 | length 52.3
  Top Layer w0.508: R34.1@94.3,63.119 93.472,63.119 92.532,62.179 92.532,55.016 95.479,52.07 108.509,52.07 v1(108.534,52.095) v1@108.636,52.197
  Bottom Layer w0.508: v1(108.534,52.095) 111.608,52.095 121.092,42.611 C47.2@121.092,39.141 ; C47.2@121.143,39.141 121.143,37.033 122.855,35.321 CH6.3@122.855,34.163
FLUID_BAG_OUT: C43.1 R35.2 U3.38 U17.1 | length 37.1
  Top Layer w0.254: v1(104.318,79.07) 104.419,79.07 104.496,79.146 104.496,78.816 105.025,78.287 U3.38@106.502,78.287
  Bottom Layer w0.254: U17.1@103.937,57.379 104.155,57.597 R35.2@104.155,60.046 104.104,60.096 C43.1@104.104,62.611 104.104,63.739 102.845,64.999 95.682,64.999 94.539,66.142 94.539,69.799 103.81,79.07 v1(104.318,79.07)
GND: C2.1 C3.2 C5.2 C6.1 C7.2 C8.2 C9.1 C10.1 C11.1 C12.1 C13.1 C14.2 C15.1 C16.1 C17.1 C18.1 C19.1 C20.1 C21.1 C22.2 C23.2 C24.1 C25.2 C27.1 C29.1 C33.2 C34.2 C35.1 C38.1 C39.1 C40.1 C41.1 C42.1 C43.2 C44.2 C45.1 C46.2 C48.1 C51.1 C53.2 C54.2 C55.2 C56.2 C57.1 C58.1 C59.1 C60.1 C61.1 C62.1 C63.2 C64.2 C65.1 C66.1 C67.1 C74.2 C75.2 C76.1 C77.2 C79.1 C81.2 C82.2 C83.1 C84.2 C86.1 CH2.4 JP1.4 JP2.4 LED1.2 R4.2 R7.1 R9.2 R11.1 R19.1 R21.2 R29.1 R36.2 R39.2 R41.2 R43.2 R45.2 R47.2 R57.1 R58.1 R70.1 R89.1 R93.1 R94.1 R97.1 R101.1 R102.1 U1.4 U2.1 U3.12 U3.18 U3.31 U3.47 U3.63 U4.8 U4.23 U4.35 U4.47 U5.10 U6.10 U7.15 U9.2 U9.4 U11.4 U14.2 U14.4 U14.9 U14.11 U15.4 U17.4 U19.7 U20.9 U20.11 U20.13 U20.15 U21.4 U22.4 U23.6 U23.8 U23.13 U23.15 U24.4 U29.2 U29.4 U29.6 U29.8 U33.4 U34.4 | length 1103.7
  Top Layer w0.254: v1(91.872,67.716) 92.608,67.716 97.702,72.81 U3.18@97.702,73.987 ; v1(92.05,78.588) 92.851,77.787 U3.12@95.402,77.787 ; U4.8@96.204,102.247 97.421,102.247 ; R11.1@97.297,112.497 97.297,111.262 98.004,110.556 U4.47@98.004,107.047 98.004,104.877 ; U3.63@97.702,85.087 97.702,90.093 R4.2@98.948,91.338 ; R7.1@99.913,67.615 99.913,66.787 100.533,66.167 103.886,66.167 104.536,66.817 C10.1@104.536,67.615 104.536,68.951 v1(105.969,70.383) ; U4.23@102.504,98.947 102.504,100.341 101.981,100.863 99.263,100.863 97.88,102.247 97.421,102.247 ; U3.31@104.202,73.987 104.202,72.734 104.75,72.187 v1(105.435,72.187) ; U3.47@106.502,82.787 112.073,82.787 112.471,83.185 v1(113.538,83.185) ; v1@111.811,104.419 v1(111.801,104.409) C16.1@109.779,104.409 108.773,104.409 107.935,105.247 U4.35@104.304,105.247 101.843,105.247 100.863,104.267 98.613,104.267 98.004,104.877 ; U23.8@151.203,55.982 152.654,55.982 153.06,56.388 153.06,57.988 152.527,58.522 U23.6@151.203,58.522 ; 97.421,102.247 98.004,102.83 98.004,104.877
  Top Layer w0.508: LED1.2@39.985,47.117 39.985,45.309 42.139,43.155 R21.2@61.382,43.155 C34.2@61.382,45.652 C33.2@61.382,50.648 61.382,56.632 63.475,58.725 C3.2@67.365,58.725 ; v1(66.929,46.025) U11.4@66.929,46.888 ; CH2.4@73.482,124.993 73.482,122.758 74.879,121.361 v1(82.982,121.361) ; v1(73.762,108.661) 75.159,107.264 C18.1@82.514,107.264 ; v1(74.219,49.936) 74.32,49.835 U9.4@76.426,49.835 78.435,49.835 78.765,50.165 78.765,51.791 78.549,52.006 ; U9.2@76.426,52.375 78.181,52.375 78.549,52.006 ; C19.1@82.514,100 C18.1@82.514,107.264 ; v1(82.982,108.839) 82.514,108.372 C18.1@82.514,107.264 ; C35.1@88.148,48.412 C35.1@88.57,48.412 ; U14.2@93.647,49.759 95.352,49.759 95.758,49.352 95.758,47.473 95.504,47.219 95.174,47.219 ; 98.948,92.608 105.603,92.608 ; U14.11@99.647,44.679 97.714,44.679 ; v1(102.997,39.497) 100.482,39.497 99.647,40.332 U14.9@99.647,42.139 97.993,42.139 97.434,42.697 97.434,44.399 97.714,44.679 ; C42.1@105.344,45.72 109.728,45.72 U15.4@110.363,46.355 110.785,45.933 C41.1@110.785,43.79 108.255,43.79 v1(107.467,44.577) ; C11.1@105.603,91.338 105.603,90.307 105.969,89.941 110.744,89.941 116.292,84.394 JP1.4@117.373,84.394 ; C61.1@111.089,66.599 111.089,66.431 112.939,64.582 C40.1@112.939,64.033 ; v1(111.582,115.849) 106.858,115.849 106.35,115.341 106.35,112.903 108.204,111.049 v1(109.296,111.049) 114.615,105.73 JP2.4@115.037,105.73 ; C46.2@112.913,61.582 C46.2@112.939,61.582 ; v1(112.979,52.553) 112.913,52.619 R41.2@112.913,54.153 112.939,54.178 C48.1@112.939,56.604 C46.2@112.939,61.582 ; v1(114.656,60.731) 113.805,61.582 C46.2@112.939,61.582 ; v1(118.389,114.529) 118.415,114.503 122.403,114.503 ; C58.1@118.659,61.544 117.881,62.321 U22.4@117.881,64.16 113.066,64.16 C40.1@112.939,64.033 ; v1(119.939,41.631) 121.387,41.631 123.673,43.917 v1(123.673,48.26) ; R29.1@120.584,46.99 122.403,46.99 v1(123.673,48.26) ; C38.1@120.584,56.642 C45.1@120.584,54.229 C39.1@120.584,51.816 122.428,51.816 ; v1(122.718,69.682) C56.2@122.718,71.526 ; v1(122.911,52.857) 122.911,52.299 122.428,51.816 ; C54.2@128.001,69.774 129.413,69.774 v1(130.556,68.631) 130.81,68.377 134.29,68.377 135.164,69.251 C55.2@135.164,70.079 ; C62.1@128.026,57.48 129.195,56.312 135.458,56.312 137.389,54.381 137.389,53.188 137.77,52.807 U20.15@139.474,52.807 141.122,52.807 141.63,52.299 v1(141.63,50.267) U20.13@139.474,50.267 137.846,50.267 137.414,49.835 137.414,48.184 137.871,47.727 U20.11@139.474,47.727 141.199,47.727 141.681,47.244 141.681,45.974 140.894,45.187 ; R58.1@128.026,64.795 128.778,64.795 v1(129.591,63.983) ; R47.2@128.361,101.143 128.219,101.285 C51.1@125.476,101.285 122.743,101.285 122.149,101.879 122.149,108.102 122.403,108.356 122.403,114.503 ; v1(132.08,61.392) 133.325,60.147 C59.1@133.899,60.147 133.452,60.594 U21.4@133.452,62.484 ; R102.1@134.605,86.589 R97.1@134.605,90.399 v1(134.605,91.76) ; U20.9@139.474,45.187 140.894,45.187 ; v1(140.31,72.796) 141.529,74.016 R89.1@141.95,74.016 ; C74.2@141.976,78.956 141.95,78.93 R89.1@141.95,74.016 ; C76.1@143.876,83.922 146.558,83.922 147.546,84.909 U29.8@147.546,85.014 ; R45.2@143.952,113.157 144.003,113.208 R43.2@144.003,115.646 144.003,116.855 142.24,118.618 124.79,118.618 122.403,116.23 122.403,114.503 ; C53.2@145.501,61.178 145.633,61.178 v1(146.634,62.179) ; C60.1@145.527,53.503 R57.1@145.527,56.053 145.598,55.982 146.431,55.982 148.58,53.833 ; v1(147.447,52.273) C63.2@148.58,51.14 ; U29.8@147.52,85.166 149.047,85.166 149.885,86.004 149.885,88.036 ; U29.6@147.52,87.706 149.555,87.706 149.885,88.036 ; U29.4@147.52,90.246 149.25,90.246 149.885,90.881 ; U29.2@147.52,92.786 149.403,92.786 149.885,93.269 ; U33.4@147.549,76.429 147.549,75.565 ; U19.7@148.034,97.127 149.075,97.127 v1(149.885,96.317) 149.885,93.269 ; C66.1@148.554,45.966 147.775,45.187 140.894,45.187 ; C63.2@148.58,50.952 C63.2@148.58,51.14 ; U29.8@148.615,85.014 v1(151.257,82.372) ; U23.8@151.203,55.982 150.216,55.982 v1(149.276,55.042) 148.58,54.346 148.58,53.833 ; U24.4@155.448,48.768 155.87,48.346 ; C65.1@155.87,43.383 155.87,48.346 ; U23.13@157.203,61.062 155.804,61.062 155.27,61.595 155.27,63.271 155.6,63.602 U23.15@157.203,63.602 159.664,63.602 v1(159.715,63.652) ; C75.2@158.887,80.086 158.913,80.061 C79.1@158.913,77.572 ; R93.1@158.913,72.644 158.913,73.863 ; v1(160.782,78.613) 159.741,77.572 C79.1@158.913,77.572 ; C64.2@166.99,57.612 168.432,57.612 168.859,58.039 v1(168.859,58.522) ; R70.1@167.015,52.619 167.858,52.619 168.808,53.569 v1(168.808,54) ; v1(169.164,48.971) 169.164,48.489 168.275,47.6 C67.1@167.066,47.6 167.066,46.899 166.522,46.355 161.087,46.355 158.445,48.997 156.52,48.997 155.87,48.346 ; 78.549,52.006 78.549,56.604 v1(78.562,56.617) 78.918,56.261 88.24,56.261 89.611,54.889 89.611,49.454 C35.1@88.57,48.412 ; C35.1@88.57,48.412 89.967,48.412 v1(91.161,47.219) U14.4@93.647,47.219 95.174,47.219 ; 95.174,47.219 97.714,44.679 ; C46.2@112.939,61.582 C40.1@112.939,64.033 ; 122.428,51.816 122.682,51.816 123.673,50.825 v1(123.673,48.26) ; R89.1@141.95,74.016 141.95,73.111 142.545,72.517 144.983,72.517 145.451,72.05 C57.1@145.451,71.145 147.549,73.243 147.549,75.565 ; 147.549,75.565 149.25,73.863 158.913,73.863 ; C63.2@148.58,51.14 148.58,53.833 ; 149.885,88.036 149.885,90.881 ; 149.885,90.881 149.885,93.269 ; 158.913,73.863 R94.1@158.913,75.082 C79.1@158.913,77.572
  Top Layer w0.762: U1.4@66.04,78.461 66.04,79.096 68.605,81.661 78.435,81.661 80.85,79.246 ; v1(75.057,72.466) 75.108,72.517 75.108,75.844 76.759,77.495 C13.1@80.85,77.495 80.85,79.246 ; C19.1@82.514,100 80.85,98.335 v1@80.85,87.784 ; v1(82.982,121.361) 91.567,121.361 95.961,116.967 C14.2@95.961,115.494 97.18,115.494 97.297,115.377 R11.1@97.297,112.497 94.651,112.497 C15.1@94.6,112.446 ; C9.1@87.376,92.202 86.182,91.008 C8.2@86.182,89.281 82.347,89.281 v1@80.85,87.784 ; C15.1@94.371,112.446 v1(94.371,109.311) v1@94.386,109.296 ; v1(95.936,93.98) R9.2@98.948,93.98 98.948,92.735 ; R4.2@98.948,91.338 98.948,92.608 ; C11.1@105.603,91.338 105.603,92.608 ; 105.603,92.735 C17.1@105.603,93.929 ; 80.85,79.246 C12.1@80.85,84.938 v1@80.85,87.784
  Bottom Layer w0.254: v1(105.435,72.187) 105.435,70.917 v1(105.969,70.383) ; v1(111.801,104.409) 113.121,105.73 JP2.4@115.037,105.73 ; v1(113.538,83.185) 113.563,83.16 114.325,83.16 115.636,84.47 JP1.4@117.297,84.47
  Bottom Layer w0.508: U6.10@63.119,111.785 63.881,111.023 68.997,111.023 C21.1@69.215,111.242 70.398,110.058 C23.2@71.933,110.058 ; v1(66.929,46.025) 66.929,49.505 67.767,50.343 73.812,50.343 v1(74.219,49.936) ; C3.2@67.365,58.725 67.365,56.13 68.656,54.839 76.784,54.839 v1(78.562,56.617) 82.601,60.655 C44.2@91.785,60.655 91.785,61.89 92.964,63.068 92.964,67.081 92.329,67.716 v1(91.872,67.716) ; v1(75.057,72.466) 77.038,70.485 83.947,70.485 v1(92.05,78.588) ; U7.15@82.626,118.567 82.626,121.006 v1(82.982,121.361) ; v1(91.161,47.219) 91.785,47.843 R39.2@91.785,53.238 ; v1(102.997,39.497) 102.997,43.129 104.419,44.552 107.442,44.552 v1(107.467,44.577) ; U17.4@103.937,53.569 112.116,53.569 112.979,52.705 v1(112.979,52.553) 113.843,51.689 121.742,51.689 v1(122.911,52.857) ; v1(105.969,70.383) 107.213,69.139 112.141,69.139 113.03,68.25 119.71,68.25 121.143,69.682 v1(122.718,69.682) 122.718,66.639 125.374,63.983 v1(129.591,63.983) ; C43.2@106.004,62.611 106.462,63.068 112.497,63.068 114.656,60.909 v1(114.656,60.731) ; U34.4@109.271,112.065 109.271,111.074 v1(109.296,111.049) ; v1(110.82,45.237) 116.332,45.237 v1(119.939,41.631) ; v1(111.582,115.849) 111.608,115.875 116.444,115.875 ; C81.2@116.444,117.113 116.444,115.875 ; R101.1@116.469,112.046 116.444,112.071 C84.2@116.444,114.567 ; v1(118.389,114.529) 118.351,114.567 C84.2@116.444,114.567 ; v1(123.673,48.26) 126.238,48.26 129.235,51.257 135.661,51.257 136.652,50.267 v1(141.63,50.267) 143.637,52.273 v1(147.447,52.273) ; v1(126.975,101.295) 126.975,95.58 130.795,91.76 v1(134.605,91.76) 134.605,93.889 137.033,96.317 v1(149.885,96.317) ; v1(130.556,68.631) 129.591,67.666 ; v1(140.31,72.796) 139.471,73.635 130.302,73.635 129.591,72.923 129.591,67.666 ; v1(151.257,82.372) 151.308,82.321 159.842,82.321 160.782,81.382 v1(160.782,78.613) ; v1(168.859,58.522) 168.808,58.471 v1(168.808,54) ; v1(169.164,48.971) 169.164,53.645 v1(168.808,54) ; C84.2@116.444,114.567 116.444,115.875 ; v1(129.591,63.983) 129.591,67.666 ; v1(129.591,63.983) 132.08,61.493 v1(132.08,61.392) 135.534,57.937 146.38,57.937 v1(149.276,55.042) 149.276,59.538 v1(146.634,62.179) 146.507,62.306 146.507,65.075 148.387,66.954 156.362,66.954 159.664,63.652 v1(159.715,63.652) 160.604,63.652 161.95,62.306 161.95,59.411 167.361,54 v1(168.808,54)
  Bottom Layer w0.762: U5.10@63.119,90.856 64.059,89.916 69.174,89.916 C20.1@70.46,91.201 70.46,90.068 71.094,89.434 C22.2@73.381,89.434 79.553,89.434 v1(80.874,88.113) 90.068,88.113 v1(95.936,93.98) ; U2.1@64.657,72.236 65.759,72.236 C7.2@68.174,74.651 70.419,74.651 C6.1@71.552,75.783 71.943,75.392 C2.1@71.943,70.434 ; C3.2@67.365,58.725 68.021,58.725 73.279,63.982 C5.2@73.279,67.386 73.279,69.098 C2.1@71.943,70.434 ; C23.2@71.933,110.058 73.315,108.676 C29.1@75.514,108.676 ; v1(75.057,72.466) 73.025,70.434 C2.1@71.943,70.434 ; v1(82.982,108.839) 83.144,108.676 C27.1@84.328,108.676 ; C24.1@88.036,118.654 88.051,118.669 C25.2@91.008,118.669 v1(94.158,118.669) 95.606,117.221 C83.1@97.196,117.221 ; v1(94.371,109.311) 95.042,109.982 C86.1@97.196,109.982 97.221,110.007 C82.2@97.221,112.42
  other v2: 48.92,78.562 45.339,78.613 55.118,78.715 51.994,78.74 125.705,79.731 123.063,79.756 120.853,79.934 120.955,82.271 55.143,83.058 49.454,83.109 52.324,83.236 130.099,83.668 120.955,84.252 55.855,86.081 52.527,86.233 49.479,86.462 46.228,86.639 39.929,86.69 42.596,86.792 37.287,86.817 56.159,88.722 53.162,88.798 50.089,89.002 46.228,89.179 37.338,89.205 39.827,89.306 43.002,89.459 82.931,91.211 56.718,91.338 53.442,91.516 77.521,91.542 43.688,91.745 47.015,91.796 50.368,91.796 37.186,91.872 40.005,91.973 77.47,94.488 51.46,94.742 54.102,94.844 57.074,94.844 48.489,95.072 79.451,101.803 77.47,101.879 75.311,102.26 79.553,103.784 51.968,103.861 48.158,103.911 54.686,103.962 77.622,103.988 75.438,104.089 37.287,104.496 43.815,107.772 46.761,107.823 40.792,107.95 49.784,107.95 55.524,108.001 37.287,108.052 52.476,108.052 43.739,111.354 47.371,111.455 37.135,111.481 50.495,111.506 40.386,111.557 53.34,111.557 56.312,111.633 36.957,114.808 52.984,115.037 56.109,115.138 49.632,115.367 65.43,120.65 68.783,120.879 89.332,122.885 65.43,123.8 68.529,123.952 49.225,124.028 56.185,124.257 52.654,124.308 89.256,125.095 49.454,126.467 52.654,126.594 65.38,126.619 56.083,126.721 68.428,126.721 89.281,127.152